# EAGLE board LNA_V1 (EAGLE 7.5.0)
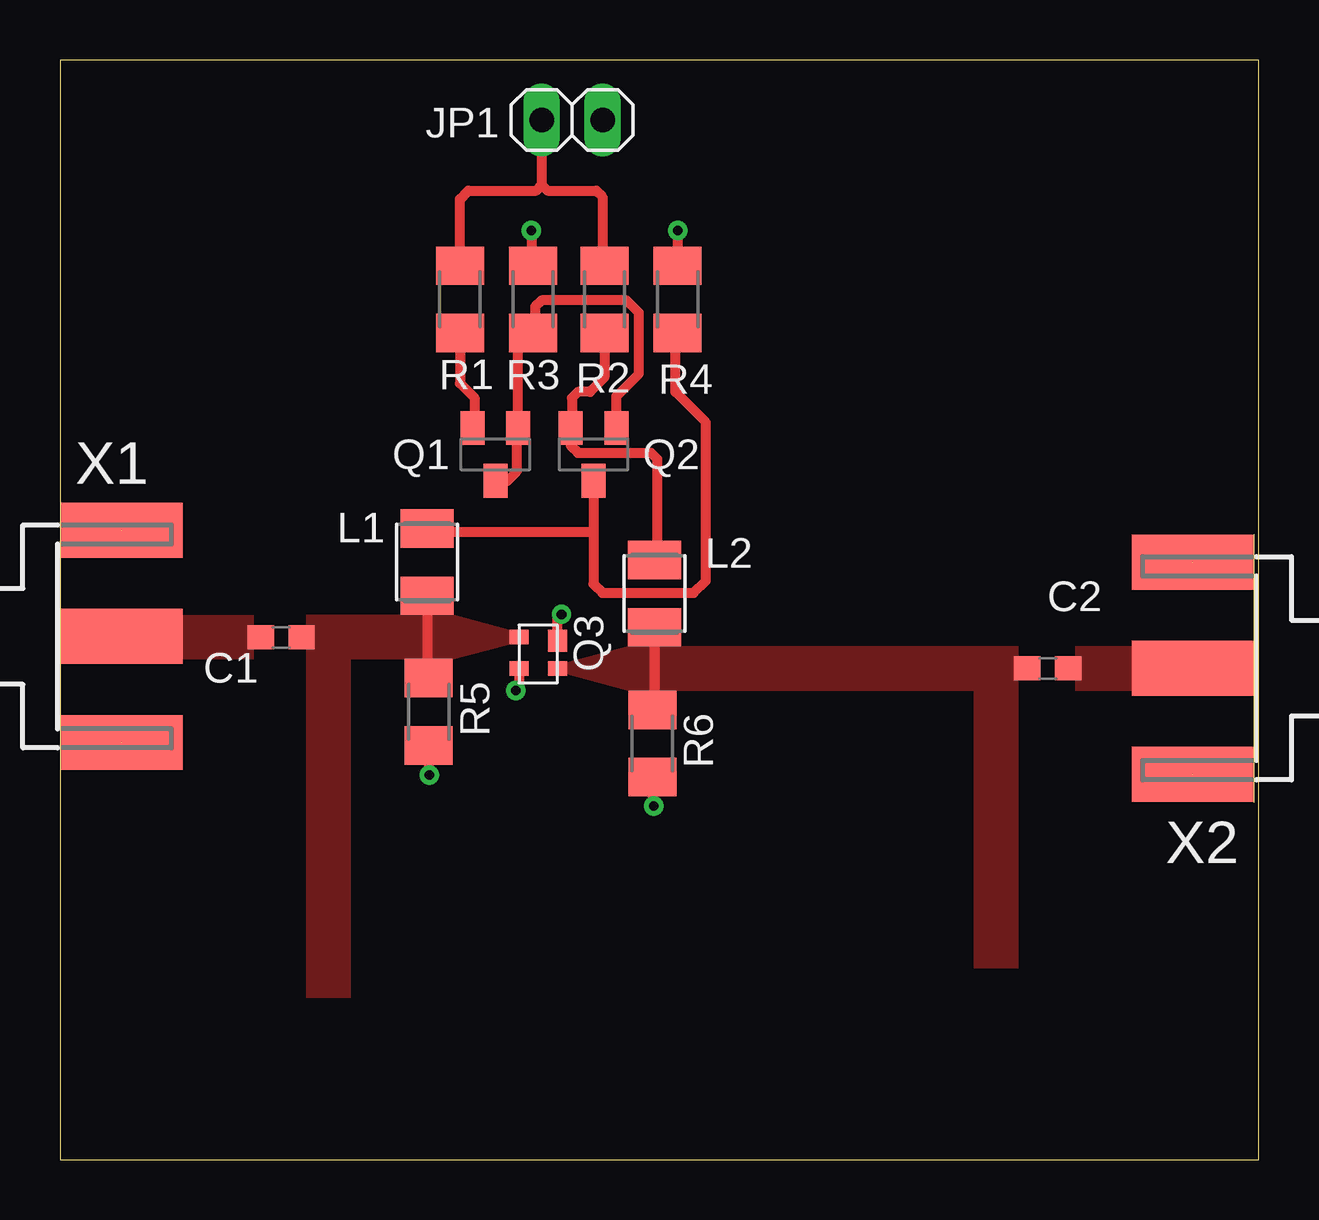
[diagram p0: board, top side]
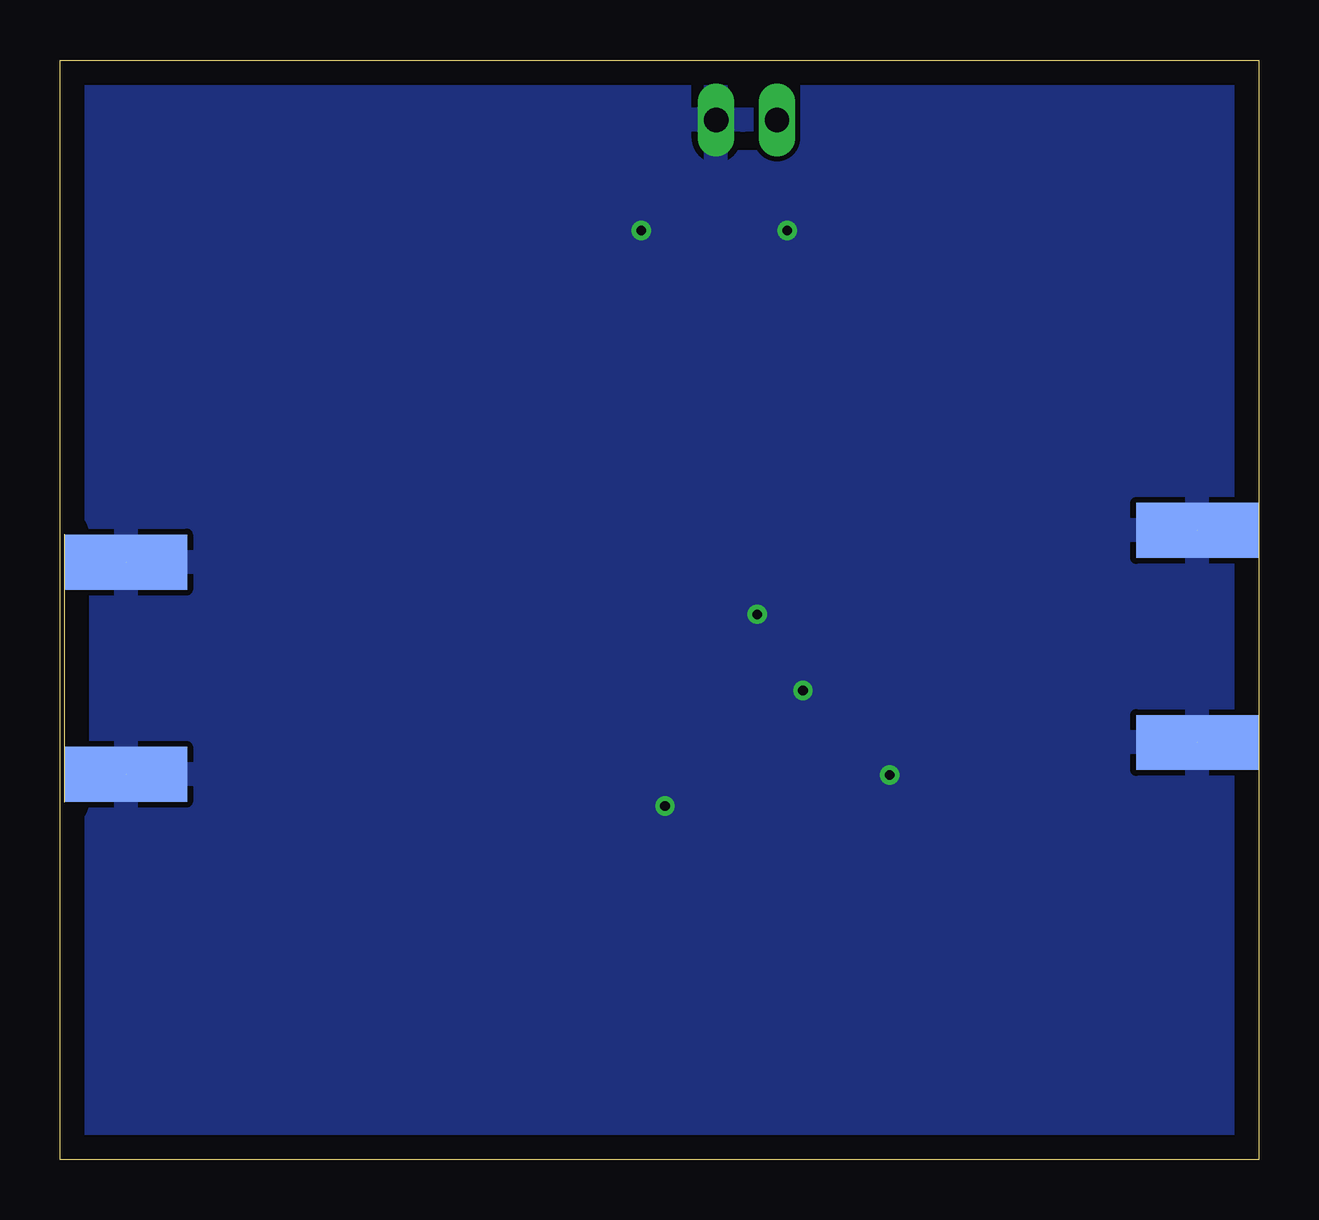
[diagram p1: board, bottom side, seen from below]

Size 49.97 x 45.83 mm. Coordinates in mm from the lower left corner, seen from the top.
Outline: 0,0 49.97,0 49.97,45.83 0,45.83 0,0
Copper layers (1*16): Top 0.035mm / dielectric 1.5mm / Bottom 0.035mm
Design rules "default": minimum track width 10mil, minimum drill 24mil, track to track 8mil, track to pad 8mil, pad to pad 8mil, via to via 8mil, smd to smd 8mil, copper to edge 40mil, drill to drill 8mil, minimum pad ring 10mil, minimum via ring 8mil, stop-mask expansion 4mil, vias tented up to drill 0mil, thermal gap 10mil

## Footprints (pad centres in the part's own frame; a part is rotated, then mirrored left to right if it is on the bottom)
C0603 = smd 1.1 x 1: 1 -0.85,0; 2 0.85,0
1X02 = drill 1.016 long: 1 -1.27,0; 2 1.27,0
L3225M = smd 1.6 x 2.2: 1 -1.4,0; 2 1.4,0
SOT23-BEC = smd 1 x 1.4: B -0.95,-1.1; C 0,1.1; E 0.95,-1.1
SOT-343 = smd 0.6 x 0.8: 1 1.3,1.6; 3 0,0; 4 1.3,0 | smd 0.9 x 0.8: 2 0.15,1.6
M1206 = smd 1.6 x 2: 1 -1.4,0; 2 1.4,0
J502-ND-142-0701-871/876 = smd 5.08 x 2.286: 1 2.565,0; G@1 2.565,4.42; G@2 2.565,-4.42 | smd 5.08 x 2.286 bottom: G@3 2.565,4.42; G@4 2.565,-4.42

## Placement (x,y rotation side)
C1  [C0603]  9.22,21.78 180 top
C2  [C0603]  41.17,20.48 180 top
JP1  [1X02]  21.35,43.33 0 top
L1  820nH  [L3225M]  15.3,24.91 270 top
L2  820nH  [L3225M]  24.78,23.59 270 top
Q1  MMBT3906LT1SMD  [SOT23-BEC]  18.15,29.4 180 top
Q2  MMBT3906LT1SMD  [SOT23-BEC]  22.24,29.4 180 top
Q3  SAV-541+  [SOT-343]  19.13,21.78 270 top
R1  3k  [M1206]  16.67,35.86 90 top
R2  15  [M1206]  22.7,35.86 90 top
R3  4320  [M1206]  19.72,35.86 90 top
R4  4320  [M1206]  25.75,35.86 90 top
R5  50  [M1206]  15.37,18.67 270 top
R6  100  [M1206]  24.69,17.35 270 top
X1  SMA-142-0701-871/876  [J502-ND-142-0701-871/876]  0,21.81 0 top
X2  SMA-142-0701-871/876  [J502-ND-142-0701-871/876]  49.77,20.49 180 top

## Library data of the parts
C1 C2 R1-R6 = rcl
JP1 = pinhead
L1 L2 = resistor
Q1 Q2 = transistor-pnp
Q3 = ECE532_Parts
X1 X2 = con-coax; MF: JOHNSON COMPONENTS; MPN: 142-0701-871; OC_FARNELL: 1339835; OC_NEWARK: 91B6105

## Nets
+3.3V: JP1.1 R1.2 R2.2
GND: JP1.2 Q3.2 Q3.4 R3.2 R4.2 R5.2 R6.2 X1.G@1 X1.G@2 X1.G@3 X1.G@4 X2.G@1 X2.G@2 X2.G@3 X2.G@4
INPUT: C1.1 L1.2 Q3.3 R5.1
ISO_INPUT: C1.2 X1.1
ISO_OUTPUT: C2.1 X2.1
N$1: Q1.B Q1.C Q2.B R3.1
N$4: Q1.E R1.1
OUTPUT: C2.2 L2.2 Q3.1 R6.1
VD: L2.1 Q2.E R2.1
VG: L1.1 Q2.C R4.1

## Tracks (layer width: path | path; a pad name or v marks a point on that pad's centre or on a via)
+3.3V
  Top 0.406: JP1.1 20.08,40.62 | 20.08,40.62 20.32,40.39 22.35,40.39 22.61,40.13 22.61,37.35 R2.2 | R1.2 16.67,40.04 17.02,40.39 19.84,40.39 20.08,40.62
GND  (via drill 0.4)  (4 unrouted)
  Top 0.406: Q3.2 20.73,22.56 v20.91,22.73 | Q3.4 19.14,19.69 v19,19.56 | v19.65,38.72 19.65,37.33 R3.2 | v25.75,38.72 R4.2 | R5.2 15.37,16.05 v15.39,16.03 | R6.2 24.69,14.81 v24.75,14.75
  pour Bottom: 60.78,-1.42 67.18,82.89 0,85.09 0,-1.27
INPUT
  Top 0.406: L1.2 15.3,20.24 15.46,20.08
  pour Top (no thermals): 10.26,22.71 16.4,22.71 16.4,20.86 10.26,20.86
  pour Top (no thermals): 18.94,22.04 16.4,22.71 16.4,20.86 18.94,21.53
ISO_INPUT
  pour Top (no thermals): 8.08,20.85 5.08,20.85 5.08,22.7 8.08,22.7
ISO_OUTPUT
  pour Top (no thermals): 42.32,21.4 44.86,21.4 44.86,19.55 42.32,19.55
N$1
  Top 0.406: Q1.C 18.65,28.3 19.05,28.7 19.05,30.45 Q1.B 19.1,33.84 R3.1 19.81,34.55 19.81,35.56 20.07,35.81 23.62,35.81 24.13,35.31 24.13,32.77 23.19,31.82 Q2.B
N$4
  Top 0.406: R1.1 16.67,32.35 17.27,31.75 17.27,30.57 Q1.E
N$6
  pour Top (no thermals): 12.11,6.76 12.11,20.86 10.26,20.86 10.26,6.76
N$8
  pour Top (no thermals): 39.94,7.99 39.94,19.55 38.1,19.55 38.1,7.99
OUTPUT
  Top 0.406: L2.2 24.78,18.84 R6.1
  pour Top (no thermals): 23.67,19.55 39.94,19.55 39.94,21.4 23.67,21.4
  pour Top (no thermals): 21.13,20.23 23.67,19.56 23.67,21.4 21.13,20.73
VD
  Top 0.406: L2.1 24.89,25.11 24.89,29.21 24.64,29.46 21.59,29.46 21.29,29.77 Q2.E 21.34,30.55 21.34,31.75 21.59,32 22.1,32 22.7,32.6 R2.1
VG
  Top 0.406: L1.1 15.44,26.16 22.1,26.16 22.24,26.3 Q2.C 22.24,23.99 22.61,23.62 26.42,23.62 26.92,24.13 26.92,30.73 25.65,32 25.65,34.37 R4.1